# Altium PCB PCB ibrahim.PcbDoc
Units mm, origin at the board's own origin, x right, y up, seen from the top; angles counter-clockwise.
Board outline 107.82 x 85.6 mm, 2 copper layers (Top Layer, Bottom Layer); 28 components, 33 nets, 100 pads, 0 vias.
Unrouted connection lines stored in the file: 47.
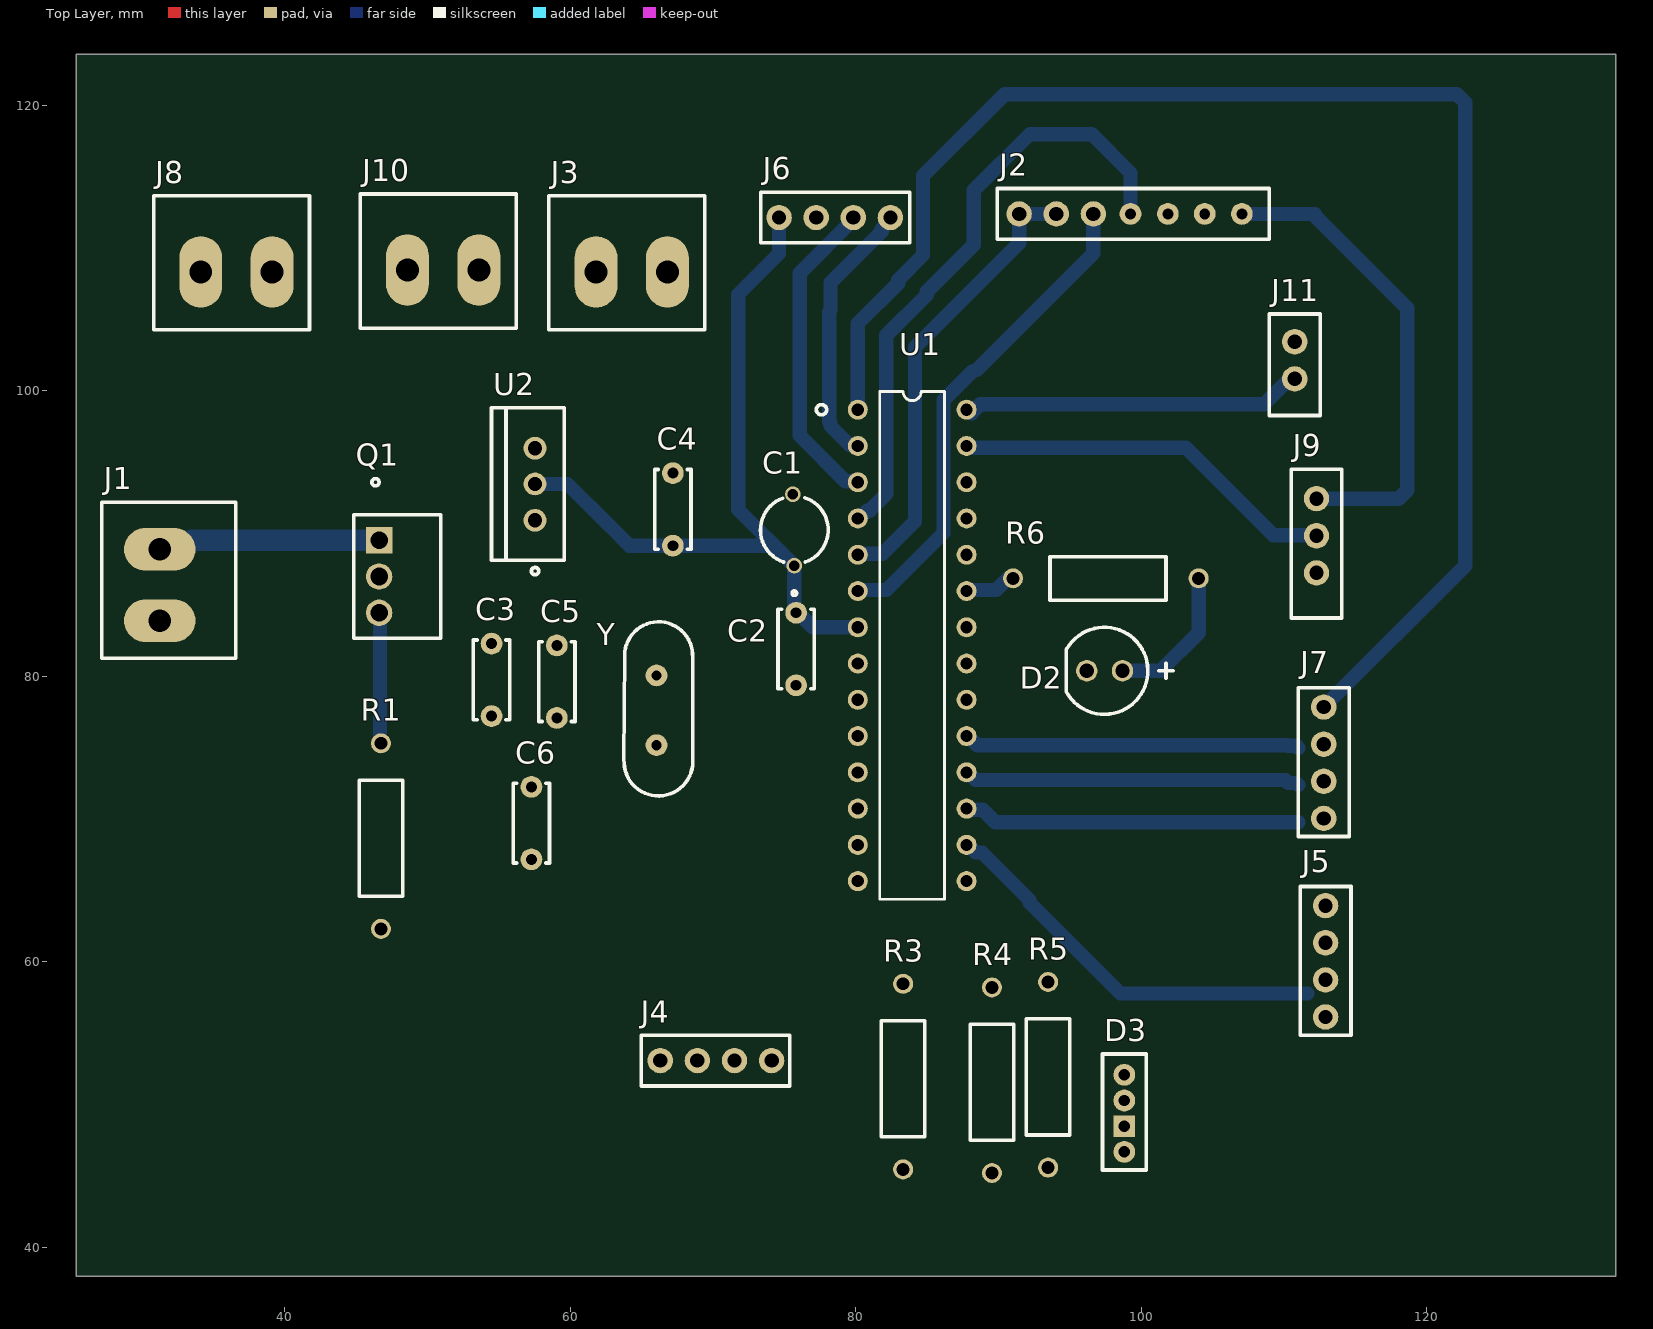
[diagram p0: Top Layer view]
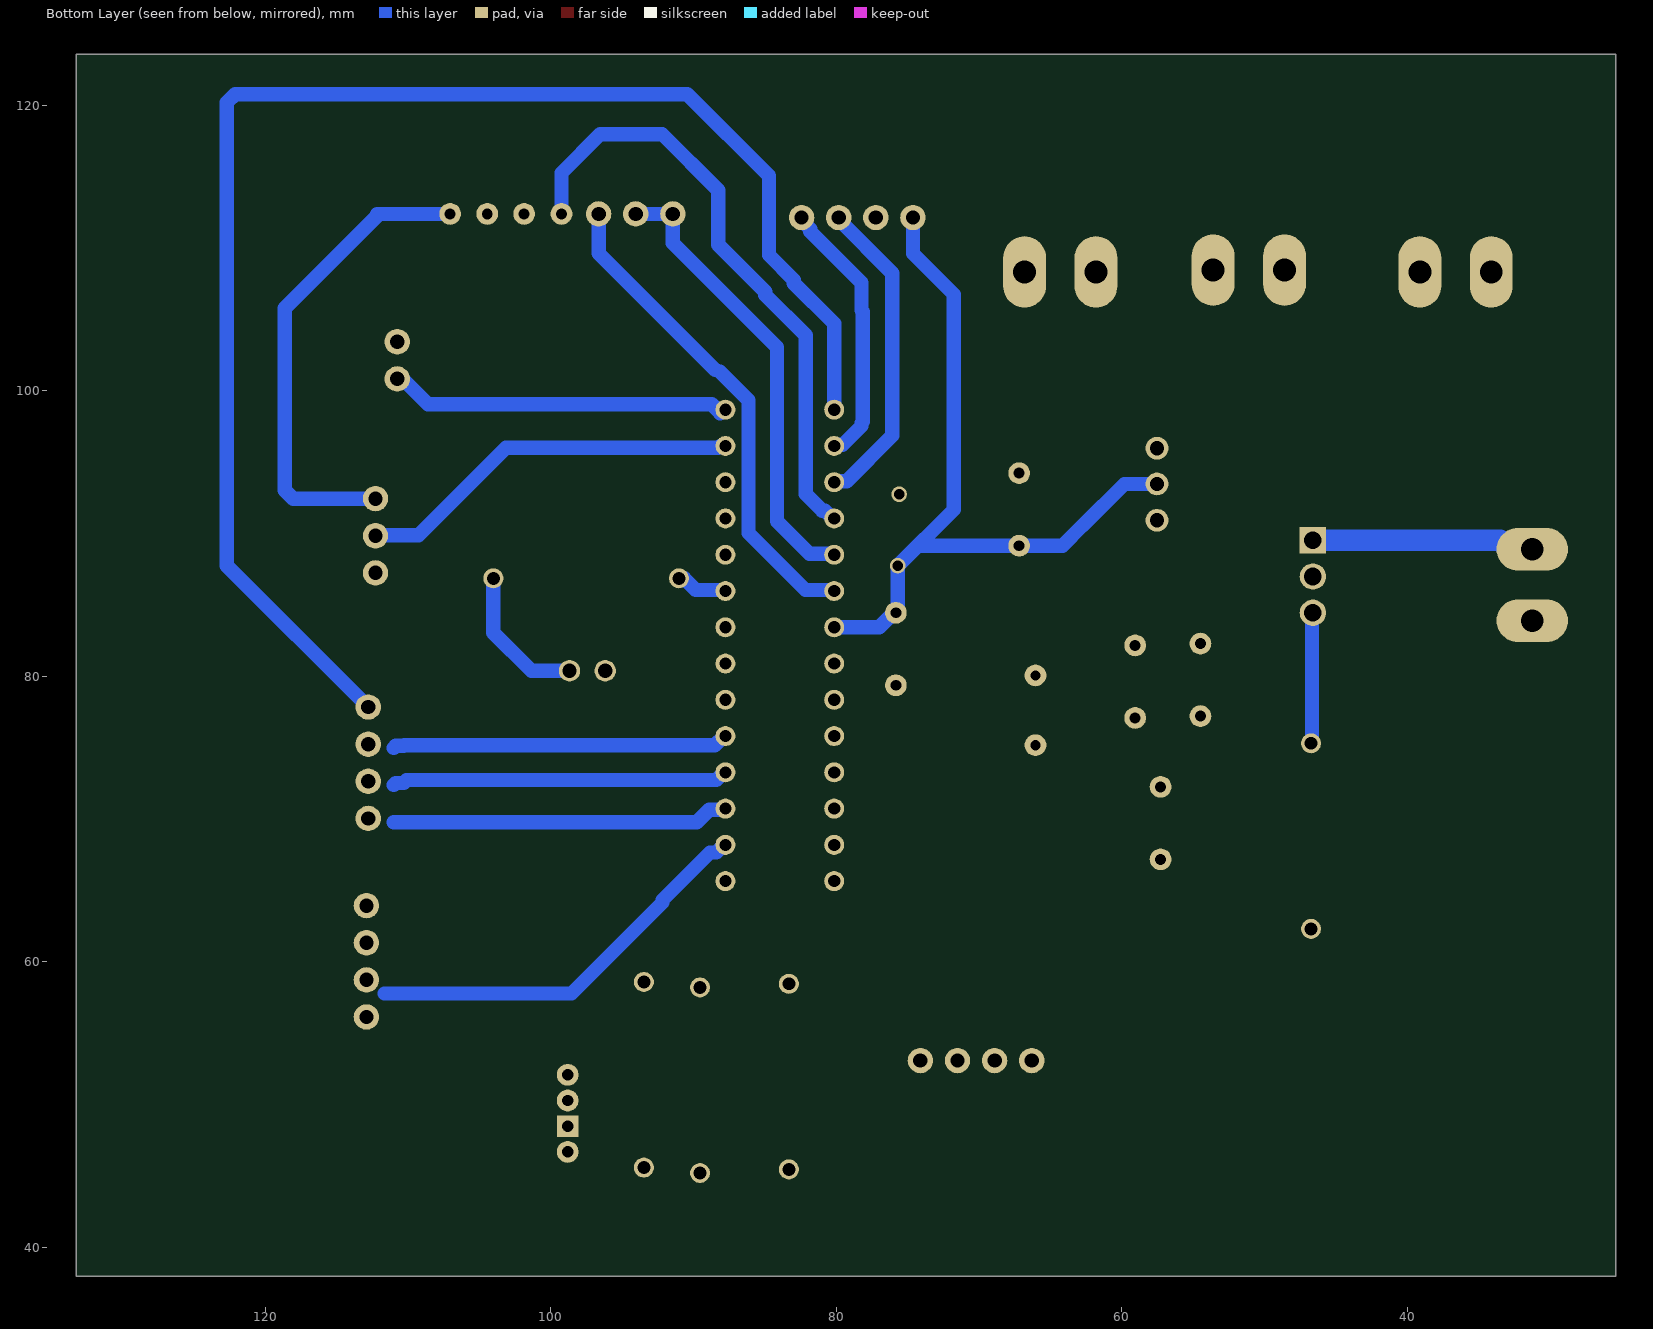
[diagram p1: Bottom Layer view, seen from below]

## Layer stack, top to bottom
Top Solder: solder mask 0.0102, Solder Resist, Dk 3.5
Top Layer: signal copper 0.0356
Dielectric 1: dielectric 0.32, FR-4, Dk 4.8
Bottom Layer: signal copper 0.0356
Bottom Solder: solder mask 0.0102, Solder Resist, Dk 3.5

## Board outline
25.4,37.973 133.223,37.973 133.223,123.571 25.4,123.571

## Design rules (kind name [scope] priority, off if disabled: settings)
Clearance [All] p1: gap=0.254 ignorepadtopadclearanceinfootprint=FALSE except(1: Arc-Arc Arc-Track Arc-Fill Arc-Poly Arc-Region Track-Track Track-Fill Track-Poly Track-Region Fill-Fill Fill-Poly Fill-Region Poly-Poly Poly-Region Region-Region)
PolygonConnect [All] p1: connectstyle=Direct reliefconductorwidth=0.254 reliefentries=4 polygonreliefangle="90 Angle" airgapwidth=0.254
RoutingVias [All] p1: holewidth=0.711 width=1.27 viastyle="Through Hole" minholewidth=0.711 minwidth=1.27 maxholewidth=0.711 maxwidth=1.27
SolderMaskExpansion [All] p1: expansion=0.102 istentingtop=FALSE
SupplyNets "Schematic Supply Nets_4" [InNet('Vin')] p1: voltage=0.000
SupplyNets "Schematic Supply Nets_3" [InNet('VCC')] p2: voltage=0.000
SupplyNets "Schematic Supply Nets_2" [InNet('GND')] p3: voltage=0.000
SupplyNets "Schematic Supply Nets_1" [InNet('+5V')] p4: voltage=0.000
SupplyNets "Schematic Supply Nets" [InNet('+5')] p5: voltage=0.000
Width [All] p1: maxlimit=1.5 minlimit=0.8 preferedwidth=1 minimp=50.000000 maximp=50.000000 favimp=50.000000
30 further rules are at their usual default settings.

## Components (designator, comment, footprint, x,y, rotation, side; value= is the part's Value field where it differs from the comment)
C1 "CAP 10uF" "Cap 10uF" 75.692,87.757 r90 top
C2 "CAP 100nF" "Cap 100nF" 75.819,84.455 r90 top
C3 "CAP 100nF" "Cap 100nF" 54.483,82.296 r90 top
C4 "CAP 100nF" "Cap 100nF" 67.183,89.154 r270 top
C5 "CAP 22pF" "Cap 22pF" 59.055,77.089 r90 top
C6 "CAP 22pF" "Cap 22pF" 57.277,72.263 r270 top
D2 "LED" LED 98.679,80.391 r180 top
D3 "RGB LED" "RGB LED" 98.806,46.692 r90 top
J1 "INPUT POWER" "Terminal Block 2pin" 22.098,88.138 r270 top
J2 "Header 7pins" "Header 7pins" 118.364,112.649 r180 top
J3 "MOTOR power" "Terminal Block 2pin" 62.564,99.187 r0 top
J4 "UltraSonic 1" "Header 4pin" 74.126,53.086 r180 top
J5 "UtraSonic 2" "Header 4pin" 112.903,56.116 r90 top
J6 "Bluetooth Module" "Header 4pin" 74.598,112.141 r0 top
J7 "Arduino as ISP" "Header 4pin" 112.776,70.026 r90 top
J8 "Measured Current" "Terminal Block 2pin" 34.878,99.187 r0 top
J9 "Current sensor" "Headers 3pins" 108.712,85.362 r270 top
J10 "Measured Voltage" "Terminal Block 2pin" 49.356,99.314 r0 top
J11 "Voltage sensor" "Header 2pins" 139.446,105.131 r90 top
Q1 "IRF5305 P-MOSFET" IRF5305 46.482,89.535 r270 top
R1 "RES 100K" Res100K 46.736,62.311 r90 top
R3 "RES 1K" "Res 1K" 83.312,45.466 r90 top
R4 "RES 1K" "Res 1K" 89.535,45.212 r90 top
R5 "RES 1K" "Res 1K" 93.472,45.593 r90 top
R6 "RES 1K" "Res 1K" 104.013,86.868 r180 top
U1 "Atmega328p" "ATMega 328 P-PU - duplicate" 80.137,65.659 r0 top
U2 "LM7805" LM7805 57.531,90.932 r90 top
Y "Crystal oscillator" "Crrystal 16MHZ" 66.04,75.184 r90 top

## Footprints (in the part's own frame and the unit in brackets; to place one, negate y for a bottom-side part, rotate by r counter-clockwise, add the part's x,y. Pads: shape width x height; smd on the part's side, far side on the other; paste and mask are expansions set on the pad)
"ATMega 328 P-PU - duplicate" [mm]
  round 1.4 hole 0.85: 1(0,33.02) 2(0,30.48) 3(0,27.94) 4(0,25.4) 5(0,22.86) 6(0,20.32) 7(0,17.78) 8(0,15.24) 9(0,12.7) 10(0,10.16) 11(0,7.62) 12(0,5.08) 13(0,2.54) 14(0,0) 15(7.62,0) 16(7.62,2.54) 17(7.62,5.08) 18(7.62,7.62) 19(7.62,10.16) 20(7.62,12.7) 21(7.62,15.24) 22(7.62,17.78) 23(7.62,20.32) 24(7.62,22.86) 25(7.62,25.4) 26(7.62,27.94) 27(7.62,30.48) 28(7.62,33.02)
  silkscreen extent -2.9,-1.27 6.09,34.29, body extent -0.14,-0.83 7.76,33.85, height 4.57
"Cap 10uF" [mm]
  round 1.1 hole 0.75: 1(0,0) 2(5,0.102)
  silkscreen extent -2.08,-2.37 4.75,2.37, body extent -0.21,-2.5 5.29,2.5, height 12.5
"Cap 22pF" [mil]
  round 60 hole 30: 1(0,0) 2(200,0)
  silkscreen extent -10,-50 210,50, body extent -11,-47 211,50, height 197
"Cap 100nF" [mil]
  round 60 hole 30: 1(-200,0) 2(0,0)
  silkscreen extent -210,-50 10,50, body extent -218,-40 18,39, height 433
"Crrystal 16MHZ" [mil]
  round 60 hole 28.74: 1(0,0) 2(192.13,0)
  silkscreen extent -140,-100 340,90, body extent -123,-92 323,92, height 256
"Header 2pins" [mil]
  round 70 hole 39.37: 1(-169,1130) 2(-66.64,1130)
  silkscreen extent -270,1060 10,1200, body extent -220,1105 -24,1155, height 290
"Header 4pin" [mil]
  round 70 hole 39.37: 1(1,0) 2(103.36,0) 3(205.72,0) 4(308.09,0)
  silkscreen extent -49,-70 361,70, body extent -49,-38 371,58, height 335
"Header 7pins" [mil]
  round 70 hole 39.37: 1(1060,10) 2(957.64,10) 3(855.28,10)
  round 60 hole 30: 4(752.91,10) 5(650,10) 6(548.19,10) 7(445.83,10)
  silkscreen extent 370,-60 1120,80, body extent 410,-40 1100,60, height 330
"Headers 3pins" [mil]
  round 70 hole 39.37: 1(-279,140) 2(-176.64,140) 3(-74.28,140)
  silkscreen extent -360,70 50,210, body extent -310,90 -10,190, height 330
IRF5305 [mm]
  rect 1.845x1.845 hole 1.23: 1(0,0.127)
  round 1.845 hole 1.23: 2(2.54,0.127) 3(5.08,0.127)
  silkscreen extent -4.32,-1.65 6.86,4.45, body extent -2.67,-1.27 7.75,3.18, height 19.3
LED [mm]
  round 1.5 hole 1: 1(0,0) 2(2.5,0)
  silkscreen extent -3.56,-3.05 3.95,3.05, body extent -1.66,-2.95 3.77,2.95, height 10.6
LM7805 [mm]
  round 1.6 hole 1: 1(0,0) 2(2.55,0) 3(5.05,0)
  silkscreen extent -3.81,-2.03 7.87,3.05, body extent -2.54,-1.84 7.62,2.86, height 19.81
Res100K [mm]
  round 1.4 hole 0.9: 1(0,0) 2(13,0)
  silkscreen extent 2.29,-1.52 10.41,1.52, body extent -0.2,-1.27 13.4,1.23, height 4.04
"Res 1K" [mm]
  round 1.4 hole 0.9: 1(0,0) 2(13,0)
  silkscreen extent 2.29,-1.52 10.41,1.52, body extent -0.2,-1.27 13.4,1.23, height 4.04
"RGB LED" [mil]
  round 60 hole 31.5: 1(0,0) 3(141.73,0) 4(212.6,0)
  rect 60x60 hole 31.5: 2(70.87,0)
  silkscreen extent -50,-60 270,60
"Terminal Block 2pin" [mm]
  oval 3x5 hole 1.6: 1(-0.762,9.144) 2(4.238,9.144)
  silkscreen extent -4.06,5.08 6.86,14.48, body extent -3.9,5.22 6.7,14.22, height 12.6

## Part data
C1: library part "CAP 10uF_1"
J1 J3 J8 J10: library part "TerminalBlock 2pin"
J4 J5 J6 J7: library part "Headers 4pin"
J9: library part "Header 3pins"
J11: library part "Headers 2pins"

## Nets (pads, with @x,y where several pads share a name; then routed paths per layer and width w, separated by ;. In a path a pad name is that pad's centre, name@x,y a point inside that pad or via, vN(x,y) a via of type N, cw(c..) or ccw(c..) an arc to the next point about the centre after c; other vN are vias at no path point)
+5: J2.7 J9.1 | length 33.6
  Bottom Layer w1: J2.7 112.141,112.395 ; 112.141,112.268 118.618,105.791 118.618,93.035 118.032,92.449 J9.1
+5V: C1.1 C2.2 C4.2 J4.1 J5.1 J6.1 U1.7 U1.20 U2.2 | length 55.9
  Bottom Layer w1: U2.2 59.807,93.482 62.728,90.561 62.738,90.561 64.145,89.154 C4.2 74.268,89.154 75.665,87.757 C1.1 ; J6.1 74.623,109.624 71.755,106.756 71.755,91.694 C1.1 ; U1.7 76.977,83.439 75.961,84.455 C2.2 75.819,84.597 75.692,84.724 C1.1 ; U1.20 U1.20@87.865,78.359
BLUE: R3.2 U1.14 | length 0.1
  Bottom Layer w1: U1.14@80.029,65.659 U1.14
CUR_SIG: J9.2 U1.27 | length 26.7
  Bottom Layer w1: U1.27@88.137,96.139 88.264,96.012 103.124,96.012 109.258,89.878 J9.2@112.268,89.878
ECHO1: J4.3 U1.11 | length 0.1
  Bottom Layer w1: U1.11 U1.11@80.245,73.279
ECHO2: J5.3 U1.25
EN: J2.1 J2.2 U1.5 | length 32.1
  Bottom Layer w1: U1.5 80.214,88.596 81.865,88.596 84.137,90.868 84.137,103.06 91.44,110.363 J2.1 J2.2
GND: C1.2 C2.1 C3.1 C4.1 C5.1 C6.1 D2.2 D3.1 J1.2 J3.2 J4.4 J5.4 J6.2 J8.2 J9.3 J10.2 J11.2 R1.1 U1.8 U1.22 U2.3
GREEN: R4.2 U1.13
IN1: J2.6 U1.26
IN2: J2.5 U1.15 | length 0.1
  Bottom Layer w1: U1.15 U1.15@87.865,65.659
IN3: J2.4 U1.4 | length 43.1
  Bottom Layer w1: U1.4 80.245,91.059 80.785,91.599 80.965,91.599 82.137,92.771 82.137,103.888 84.963,106.714 84.963,106.934 88.265,110.236 88.265,114.046 92.202,117.983 96.52,117.983 99.24,115.263 J2.4
IN4: J2.3 U1.6 | length 34.1
  Bottom Layer w1: U1.6 80.214,86.056 82.153,86.056 86.137,90.04 86.137,99.345 88.138,101.346 ; 88.465,101.469 96.64,109.644 J2.3
LED_ind: R6.2 U1.23 | length 3.4
  Bottom Layer w1: U1.23 87.834,86.056 89.838,86.056 90.651,86.868 R6.2@90.759,86.868
MISO: J7.2 U1.18 | length 23.6
  Bottom Layer w1: U1.18 87.865,73.279 88.405,72.739 110.099,72.739 110.299,72.539 110.849,72.539 110.998,72.39
MOSI: J7.1 U1.17 | length 23.6
  Bottom Layer w1: U1.17 87.834,70.662 88.887,70.662 89.76,69.79 110.998,69.79
NetC5_2: C5.2 U1.9 Y.2 | length 0.1
  Bottom Layer w1: U1.9@80.06,78.282 U1.9
NetC6_2: C6.2 U1.10 Y.1 | length 0.1
  Bottom Layer w1: U1.10@80.029,75.819 U1.10
NetD2_1: D2.1 R6.1 | length 10.5
  Bottom Layer w1: D2.1@98.77,80.482 D2.1 101.346,80.391 104.013,83.058 R6.1 R6.1@104.09,86.791
NetD3_2: D3.2 R5.1
NetD3_3: D3.3 R4.1
NetD3_4: D3.4 R3.1
NetQ1_3: Q1.3 R1.2 | length 9.2
  Bottom Layer w1: Q1.3 46.672,84.391 46.672,75.374 R1.2
RED: R5.2 U1.24 | length 0.1
  Bottom Layer w1: U1.24 U1.24@87.865,88.519
Reset: J7.4 U1.1 | length 105.3
  Bottom Layer w1: U1.1 80.137,104.717 82.963,107.543 82.963,107.762 84.709,109.508 84.709,115.062 90.424,120.777 122.096,120.777 122.682,120.191 122.682,87.757 J7.4
RX: J6.4 U1.2 | length 18.9
  Bottom Layer w1: U1.2 80.06,96.216 79.552,96.216 78.232,97.536 78.232,97.756 78.137,97.851 78.137,105.545 78.232,105.64 78.232,107.576 81.823,111.167 81.823,111.33 82.423,111.93 J6.4
SCK: J7.3 U1.19 | length 23.6
  Bottom Layer w1: U1.19 87.865,75.819 88.5,75.184 110.254,75.184 110.299,75.139 110.849,75.139 110.998,74.99
TRIG1: J4.2 U1.12 | length 0.1
  Bottom Layer w1: U1.12 U1.12@80.245,70.739
TRIG2: J5.2 U1.16 | length 28.3
  Bottom Layer w1: U1.16 87.865,68.199 88.405,67.659 88.839,67.659 92.17,64.328 92.17,64.167 98.545,57.792 111.633,57.792
TX: J6.3 U1.3 | length 22.2
  Bottom Layer w1: J6.3 79.823,111.995 76.073,108.245 76.073,96.867 79.264,93.676 80.06,93.676 U1.3
VCC: C3.2 J3.1 J8.1 J10.1 Q1.2 U2.1
Vin: J1.1 Q1.1 | length 15.7
  Bottom Layer w1.5: J1.1@31.242,88.693 32.648,88.693 33.49,89.535 Q1.1
VOLT_SIG: J11.1 U1.28 | length 23.3
  Bottom Layer w1: U1.28@88.137,98.425 88.137,98.474 88.723,99.06 108.585,99.06 J11.1@110.363,100.838
pads on no net: U1.21